# Altium PCB PCB1.PcbDoc
Units mil, origin at the board's own origin, x right, y up, seen from the top; angles counter-clockwise.
Board outline 6000 x 4000 mil, 2 copper layers (Top Layer, Bottom Layer); 2 components, 20 nets, 28 pads, 0 vias.
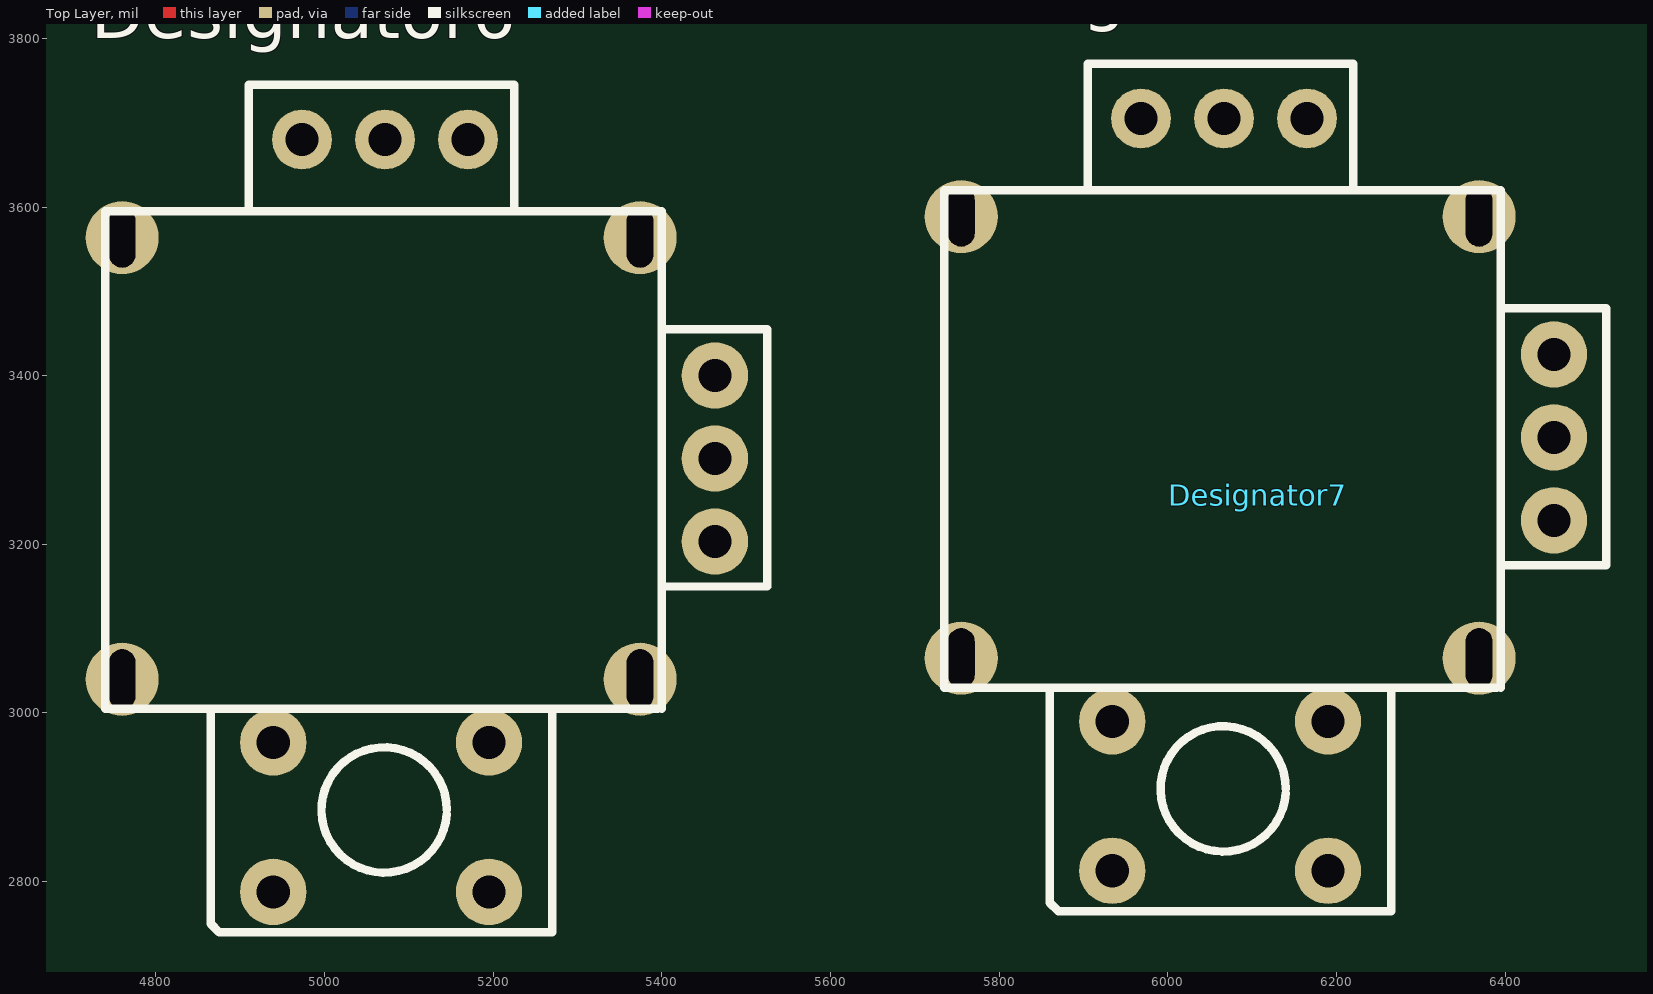
[diagram p0: Top Layer view]
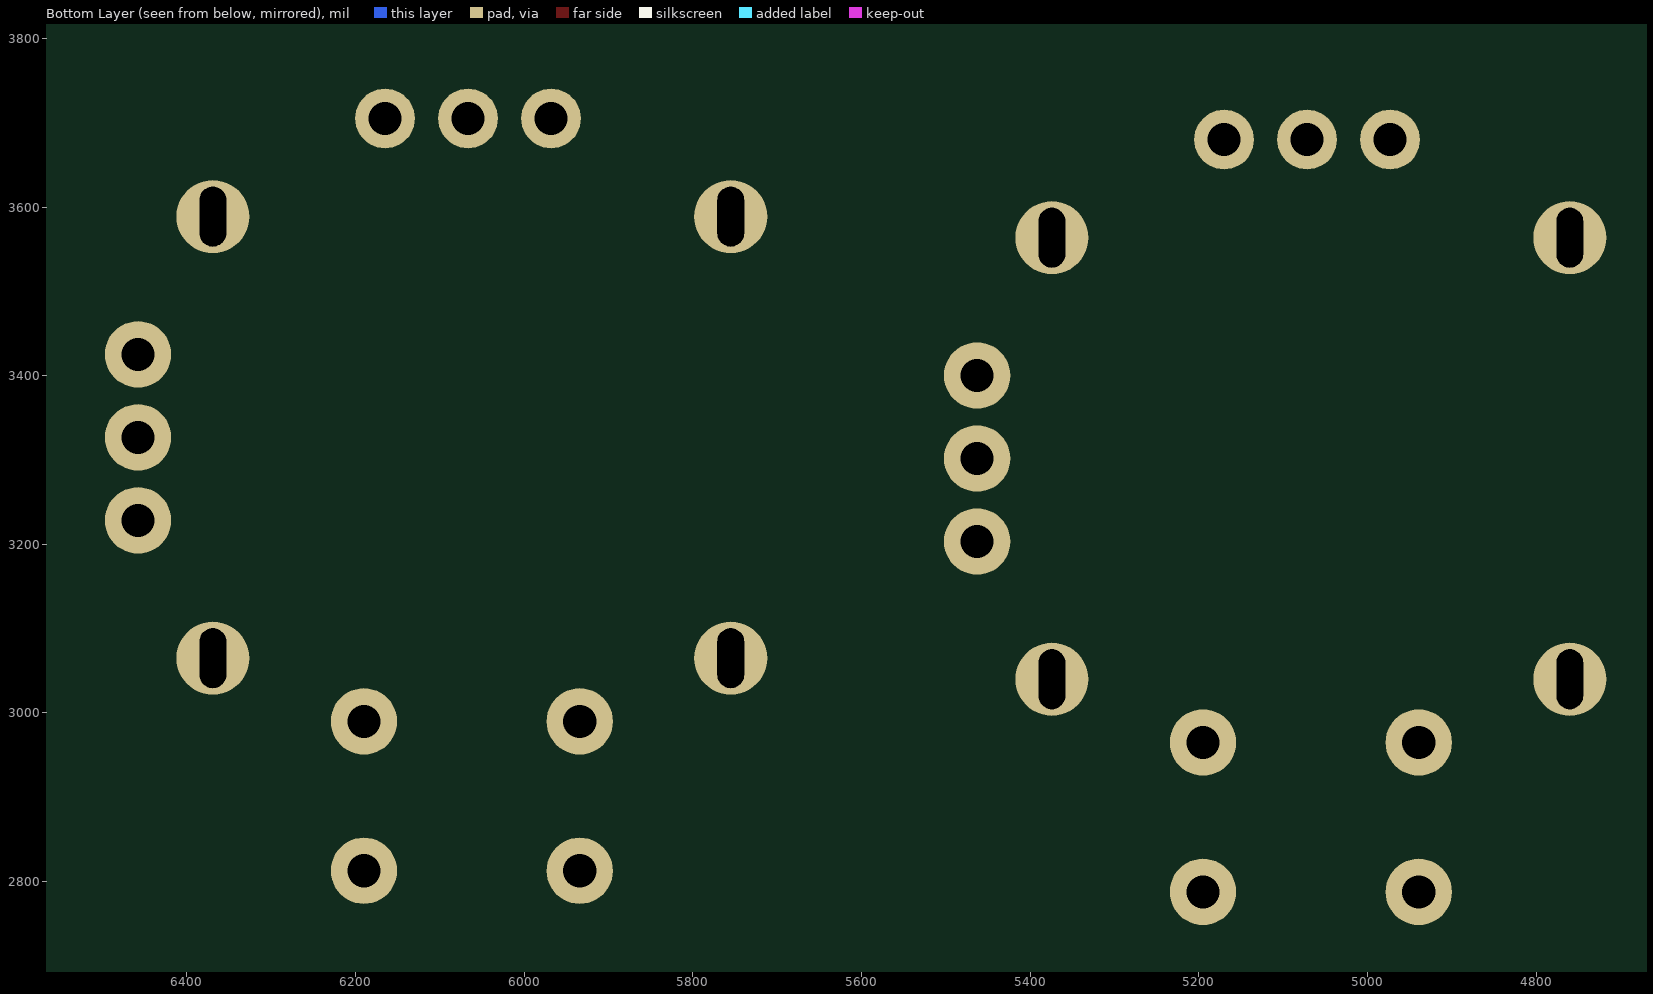
[diagram p1: Bottom Layer view, seen from below]

## Layer stack, top to bottom
Top Layer: signal copper 1.4
Dielectric: dielectric 12.6, FR-4, Dk 4.8
Bottom Layer: signal copper 1.4

## Board outline
1000,1000 7000,1000 7000,5000 1000,5000

## Design rules (kind name [scope] priority, off if disabled: settings)
Clearance [All] p1: gap=10
PolygonConnect [All] p1: connectstyle=Relief reliefconductorwidth=10 reliefentries=4 polygonreliefangle="90 Angle"
RoutingVias [All] p1: holewidth=28 width=50 viastyle="Through Hole" minholewidth=28 minwidth=50 maxholewidth=28 maxwidth=50
SilkscreenOverComponentPads [All] p1: minsilkscreentomaskgap=10
SolderMaskExpansion [All] p1: expansion=4
Width [All] p1: maxlimit=20 minlimit=10 preferedwidth=10
27 further rules are at their usual default settings.

## Components (designator, comment, footprint, x,y, rotation, side; value= is the part's Value field where it differs from the comment)
Designator6 "Comment" 摇杆 4760,3040 r0 top
Designator7 "Comment" 摇杆 5755,3065 r0 top

## Footprints (in the part's own frame and the unit in brackets; to place one, negate y for a bottom-side part, rotate by r counter-clockwise, add the part's x,y. Pads: shape width x height; smd on the part's side, far side on the other; paste and mask are expansions set on the pad)
摇杆 [mm]
  round 2.2 hole 0.8 slot 1.8 at 90 deg: 0(0,0) 0(0,13.3) 0(15.6,0) 0(15.6,13.3)
  round 1.8 hole 1: 1(5.414,16.256) 2(7.914,16.256) 3(10.414,16.256)
  round 2 hole 1: 4(17.854,9.15) 5(17.854,6.65) 6(17.854,4.15) 7(4.549,-6.405) 8(11.049,-6.405) 9(4.549,-1.905) 10(11.049,-1.905)
  silkscreen extent -0.51,-7.62 19.43,17.91

## Nets (pads, with @x,y where several pads share a name; then routed paths per layer and width w, separated by ;. In a path a pad name is that pad's centre, name@x,y a point inside that pad or via, vN(x,y) a via of type N, cw(c..) or ccw(c..) an arc to the next point about the centre after c; other vN are vias at no path point)
CE: 
CSN: 
GND: 
IRQ: 
MISO: 
MOSI: 
NetC8_2: 
NetC9_2: 
NetC11_2: 
NetD1_1: 
NetLED2_1: 
NetLED2_2: 
PWM: 
RST: 
RX: 
SCK: 
SWIM: 
TX: 
VCC: 
VCC3.3: 
pads on no net: Designator6.0 Designator6.1 Designator6.2 Designator6.3 Designator6.4 Designator6.5 Designator6.6 Designator6.7 Designator6.8 Designator6.9 Designator6.10 Designator7.0 Designator7.1 Designator7.2 Designator7.3 Designator7.4 Designator7.5 Designator7.6 Designator7.7 Designator7.8 Designator7.9 Designator7.10